# EAGLE board Board (EAGLE 5.10)
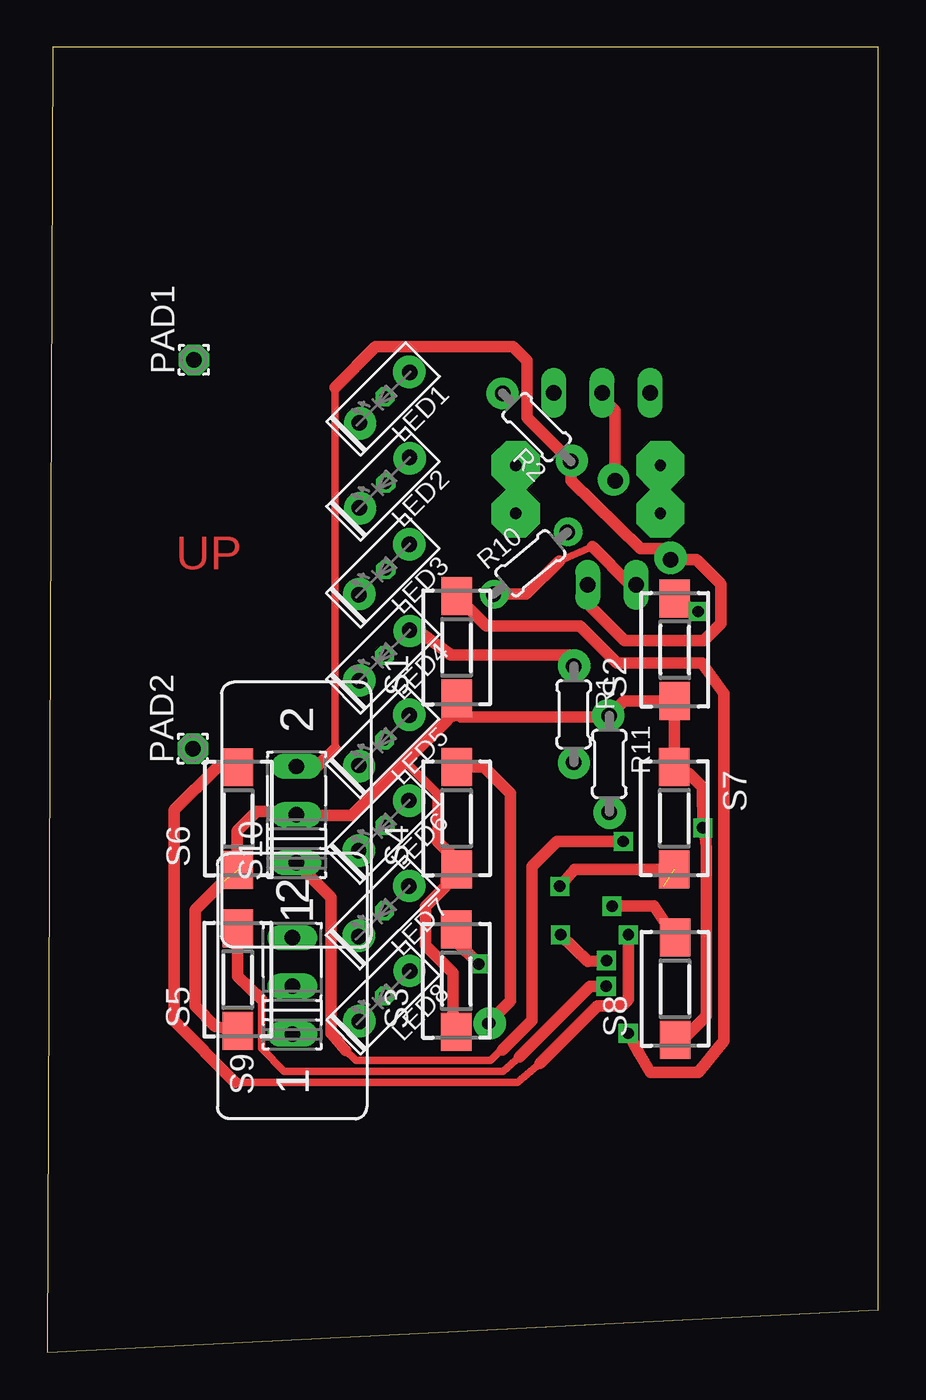
[diagram p0: board, top side]
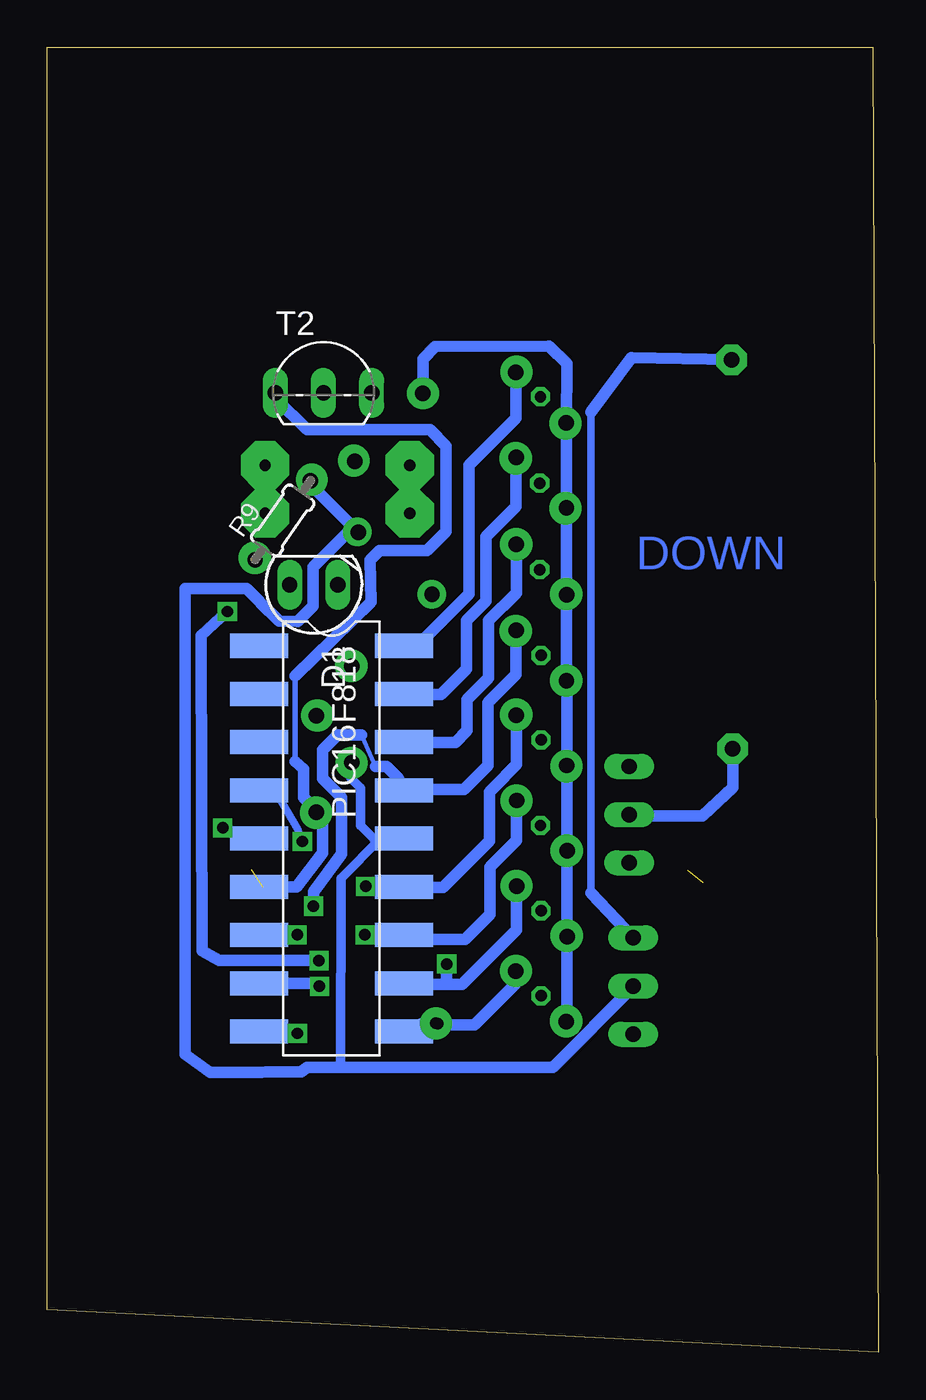
[diagram p1: board, bottom side, seen from below]

Size 43.77 x 68.73 mm. Coordinates in mm from the lower left corner, seen from the top.
Outline: 0,0 43.77,2.23 43.77,68.73 0.27,68.73 0,0
Copper layers (1*16): Top 0.035mm / dielectric 1.5mm / Bottom 0.035mm
Design rules "default *": minimum track width 10mil, minimum drill 24mil, track to track 5mil, track to pad 5mil, pad to pad 5mil, via to via 5mil, smd to smd 8mil, copper to edge 20mil, drill to drill 8mil, minimum pad ring 10mil, minimum via ring 8mil, stop-mask expansion 4mil, vias tented up to drill 0mil, thermal gap 10mil

## Footprints (pad centres in the part's own frame; a part is rotated, then mirrored left to right if it is on the bottom)
SFH205 = drill 0.813 long: A 0,-1.27; K 0,1.27
LED2X5 = drill 0.813 octagon: A -1.878,0; K 1.878,0
1,6/0,8 = drill 0.813 pad 1.6 octagon: 1 0,0
PIC16F818 = smd 1.27 x 3.048: P$1 -8.89,-3.81; P$2 -6.35,-3.81; P$3 -3.81,-3.81; P$4 -1.27,-3.81; P$5 1.27,-3.81; P$6 3.81,-3.81; P$7 6.35,-3.81; P$8 8.89,-3.81; P$9 11.43,-3.81; P$10 11.43,3.81; P$11 8.89,3.81; P$12 6.35,3.81; P$13 3.81,3.81; P$14 1.27,3.81; P$15 -1.27,3.81; P$16 -3.81,3.81; P$17 -6.35,3.81; P$18 -8.89,3.81
0204/5 = drill 0.813 octagon: 1 -2.54,0; 2 2.54,0
DTSM-3 = smd 2 x 1.6: 1 -2.7,0; 2 2.7,0
M251 = drill 0.813 long: 1 -2.54,0; 2 0,0; 3 2.54,0
TO92-ECB = drill 0.813 long: B 2.54,0; C 0,0; E -2.54,0

## Placement (x,y rotation side)
D1  SFH205  [SFH205]  29.74,40.42 270 bottom
LED1  [LED2X5]  17.76,50.28 225 top
LED2  [LED2X5]  17.75,45.8 225 top
LED3  [LED2X5]  17.74,41.23 225 top
LED4  [LED2X5]  17.75,36.7 225 top
LED5  [LED2X5]  17.73,32.23 225 top
LED6  [LED2X5]  17.72,27.73 225 top
LED7  [LED2X5]  17.72,23.22 225 top
LED8  [LED2X5]  17.76,18.74 225 top
PAD1  WIREPAD4,16O1,6  [1,6/0,8]  7.71,52.28 90 top
PAD2  WIREPAD4,16O1,6  [1,6/0,8]  7.66,31.79 90 top
PIC1  PIC16F818  [PIC16F818]  28.8,28.32 270 bottom
R1  47k  [0204/5]  27.73,33.6 270 top
R2  560  [0204/5]  25.78,48.72 135 top
R9  47k  [0204/5]  31.37,43.82 55 bottom
R10  470  [0204/5]  25.45,41.56 40 top
R11  47k  [0204/5]  29.6,30.99 270 top
S1  DTSM-3  [DTSM-3]  21.56,37.12 90 top
S2  DTSM-3  [DTSM-3]  33.05,37 90 top
S3  DTSM-3  [DTSM-3]  21.55,19.56 90 top
S4  DTSM-3  [DTSM-3]  21.56,28.12 90 top
S5  DTSM-3  [DTSM-3]  10.03,19.62 90 top
S6  DTSM-3  [DTSM-3]  10.05,28.11 90 top
S7  DTSM-3  [DTSM-3]  33.03,28.12 270 top
S8  DTSM-3  [DTSM-3]  33.07,19.14 90 top
S9  [M251]  12.9,19.28 90 top
S10  [M251]  13.12,28.31 90 top
T2  [TO92-ECB]  29.22,50.53 0 bottom

## Library data of the parts
D1 = opto-trans-siemens
LED1-LED8 = led grande cuadrado
PAD1 PAD2 = wirepad
PIC1 = pic16f818
R1 R2 R9-R11 = resistor
S1-S8 = switch-tact
S9 S10 = switch
T2 = transistor

## Nets
N$1: PIC1.P$14 R1.2 R9.2 R10.2 S9.2 T2.C
N$3: PAD1.1 S9.3
N$4: LED1.K LED2.K LED3.K LED4.K LED5.K LED6.K LED7.K LED8.K R2.2
N$6: PAD2.1 PIC1.P$5 R11.1 S1.1 S2.1 S3.1 S4.1 S5.1 S6.1 S7.1 S8.1 S10.2
N$7: LED8.A PIC1.P$10 S4.2
N$8: PIC1.P$7 S6.2
N$9: PIC1.P$9 S1.2
N$10: PIC1.P$8 S5.2
N$11: LED5.A PIC1.P$13 S7.2
N$12: LED4.A PIC1.P$15 R1.1 S8.2
N$13: LED7.A PIC1.P$11 S3.2
N$14: PIC1.P$4 S10.1
N$15: D1.K R2.1 R9.1 S10.3
N$19: LED6.A PIC1.P$12 S2.2
N$20: LED1.A PIC1.P$18
N$22: LED2.A PIC1.P$17
N$23: PIC1.P$6 R11.2 T2.E
N$24: D1.A R10.1
N$72: LED3.A PIC1.P$16

## Tracks (layer width: path | path; a pad name or v marks a point on that pad's centre or on a via)
N$1
  Top 0.6: T2.C 29.22,50.28 29.91,49.59 R9.2
  Bottom 0.406: 28.34,15.01 27.23,15.01 | 25.09,27.15 PIC1.P$14 26.22,27.05 | R10.2 27.4,43.62
  Bottom 0.5: R1.2 27.73,30.27 27.77,30.23 27.27,29.73 27.27,27.73 26.59,27.05 26.22,27.05 28.29,24.94 28.34,15.01
  Bottom 0.6: S9.2 12.9,19.26 17.13,14.99 26.87,14.99 28.34,15.01 | 29.77,46.04 R9.2 29.91,45.71 27.66,43.46 | 27.66,43.46 R10.2 | 27.66,43.46 29.77,41.35 29.77,39.31 30.59,38.48 31.57,38.5 32.56,39.49 32.56,39.52 33.27,40.23 36.51,40.23 36.51,15.69 35.2,14.74 32.49,14.74 32.26,14.75 30.41,14.75 30.08,15.01 27.23,15.01
N$2  (via drill 0.6 pad 1.7)
  other vias: 19.06,51.64
N$3
  Bottom 0.4: 15.14,49.52 15.14,24.19
  Bottom 0.6: PAD1.1 12.99,52.39 15.14,49.52 | S9.3 15.14,24.19
N$4
  Bottom 0.406: LED1.K | LED2.K | LED3.K 16.42,39.89 | LED4.K 16.4,35.35 | LED5.K | LED8.K 16.39,17.45
  Bottom 0.6: R2.2 23.98,52.32 23.34,52.98 17.35,53 16.4,52.08 16.42,48.96 LED1.K | LED2.K LED1.K | LED2.K | LED2.K 16.42,39.91 LED3.K 16.41,35.38 LED4.K | 16.4,35.35 LED5.K | LED5.K | LED5.K 16.4,26.41 LED6.K LED7.K | 16.39,17.45 LED7.K | LED7.K
N$5  (via drill 0.6 pad 1.7)
  other vias: 16.47,48.93
N$6  (via drill 0.6)  (1 unrouted)
  Top 0.4: 21.79,33.46 21.07,33.36
  Top 0.406: 12.95,28.48 S10.2 13.17,28.26 | 9.98,25.49 S6.1 | 33.7,16.69 S8.1 | 34.62,27.38 v34.53,27.62 34.57,27.28 | S7.1 33.8,30.49 | S2.1 32.9,34.27 | 21.59,33.53 S1.1 21.79,33.46 | 21.62,25.68 20.99,25.68 S4.1 | 21.37,16.67 S3.1
  Top 0.5: 21.56,25.92 21.19,26.29 | 20.52,26.92 20.52,29.43 18.87,31.08
  Top 0.6: 21.79,33.46 29.53,33.46 R11.1 30.37,34.3 S2.1 33.03,34.28 S7.1 | 13.17,28.26 16.02,28.26 18.87,31.11 | 18.87,31.11 21.07,33.31 21.07,33.36 | 21.19,26.29 21.19,25.79 S4.1 21.01,24.87 21.01,24.56 19.92,23.47 19.92,21.42 21.37,19.97 21.37,16.67 | 20.52,26.92 21.56,25.92 | 18.87,31.11 18.87,31.08 | 9.24,24.75 7.77,23.28 7.77,18.23 8.84,17.16 S5.1 | 9.98,25.49 9.99,25.5 9.99,27.45 11.02,28.48 12.95,28.48 | 33.8,30.49 34.52,29.77 v34.53,27.62 34.7,27 34.71,26.43 34.71,17.7 33.7,16.69
  Bottom 0.406: v34.53,27.62 32.63,27.03 PIC1.P$5
  Bottom 0.6: PAD2.1 7.66,29.74 9.27,28.23 13.04,28.23 S10.2
N$7  (via drill 0.6)
  Top 0.6: S4.2 23.01,30.82 24.4,29.43 24.4,18.49 v23.21,17.3
  Bottom 0.4: 24.49,16.89 PIC1.P$10
  Bottom 0.406: PIC1.P$10 24.88,17.28
  Bottom 0.6: LED8.A 19.09,19.41 21.27,17.23 23.14,17.23 v23.21,17.3 24.08,17.3 24.49,16.89
N$8  (via drill 0.6)
  Top 0.406: 25.96,15.21 24.76,14.2 9.9,14.21 | v30.61,21.98 30.55,21.92
  Top 0.6: 25.96,15.21 28.98,18.23 30.27,18.23 30.61,18.57 v30.61,21.98 | S6.2 8.93,30.81 6.67,28.55 6.67,17.44 9.9,14.21
  Bottom 0.406: PIC1.P$7
  Bottom 0.6: v30.61,21.98 v30.62,21.97 PIC1.P$7
N$9  (via drill 0.6)
  Top 0.6: v30.6,16.79 31.19,15.72 31.76,14.74 34.3,14.74 35.63,16.4 35.63,34.69 34.48,36.3 30,36.3 28.05,38.25 23.13,38.25 S1.2
  Bottom 0.406: 31.72,16.86 32.58,16.86 PIC1.P$9
  Bottom 0.6: 31.72,16.86 31.49,16.63 v30.6,16.79
N$10  (via drill 0.6)
  Top 0.406: 11.29,18.57 11.29,15.99 12.48,14.79 24.01,14.78 24.86,15.55
  Top 0.6: S5.2 10.03,19.79 11.29,18.57 | 24.86,15.55 28.58,19.27 v29.44,19.27
  Bottom 0.406: PIC1.P$8 32.45,19.27
  Bottom 0.6: v29.44,19.27 29.6,19.43 PIC1.P$8
N$11  (via drill 0.6)  (1 unrouted)
  Top 0.6: v27,24.54 27.76,25.43 S7.2
  Bottom 0.406: 19.06,33.53 LED5.A | 24.88,24.4 PIC1.P$13 v27,24.54 26.01,24.49
  Bottom 0.6: 19.06,33.53 19.06,30.94 20.27,29.73 20.27,29.71 20.48,29.5 20.48,26.93 22.92,24.49 24.97,24.49 PIC1.P$13
N$12  (via drill 0.6)
  Top 0.4: R1.1 27.73,36.26
  Top 0.6: LED4.A 19.47,38.03 21.27,36.73 27.64,36.73 R1.1 | v29.75,23.49 31.96,23.49 S8.2
  Bottom 0.2: 27.23,32.52 27.05,32.16 26.47,30.85
  Bottom 0.406: PIC1.P$15 24.76,29.36
  Bottom 0.6: 27.23,32.52 28.48,32.52 29.27,31.73 29.27,30.23 28.27,29.23 28.27,26.23 29.75,24.24 29.76,23.7 v29.75,23.49 | 26.47,30.85 25.89,30.85 25.27,30.23 25.27,29.87 PIC1.P$15 24.94,29.64 21.82,29.64 20.55,30.91 20.55,34.23 19.08,35.7 LED4.A
N$13  (via drill 0.6)
  Top 0.4: S3.2 21.55,21.62
  Top 0.6: 21.55,21.62 v22.73,20.44
  Bottom 0.406: PIC1.P$11 24.86,19.3
  Bottom 0.6: LED7.A 19.05,22.25 21.93,19.37 22.77,19.37 | 22.77,19.37 24.93,19.37 PIC1.P$11 | v22.73,20.44 22.73,19.41 22.77,19.37
N$14  (via drill 0.6)
  Top 0.4: 15.71,15.9 16.25,15.36 23.34,15.36 23.9,15.92 23.99,15.92
  Top 0.6: S10.1 14.94,23.95 14.94,16.79 15.71,15.9 | v30.34,26.9 26.85,26.9 25.53,25.58 25.53,17.46 23.99,15.92
  Bottom 0.4: PIC1.P$4 32.58,29.56 31.63,29.36 30.58,27.56 30.4,26.84 v30.34,26.9
N$15
  Top 0.4: R9.1 32.87,41.82 | 17.77,52.97 17.6,52.97 | 15.15,50.81 15.15,31.77
  Top 0.6: S10.3 14.22,30.85 15.15,31.77 | 15.15,50.81 17.3,52.97 17.77,52.97 24.53,52.97 25.27,52.23 25.27,49.23 R2.1 27.58,45.92 31.25,42.33 32.32,42.33 R9.1 34.2,41.74 35.48,40.46 35.48,38.39 34.58,37.49 30.4,37.49 28.47,39.42 D1.K
N$16  (via drill 0.6 pad 1.7)
  other vias: 16.47,44.45
N$17  (via drill 0.6 pad 1.7)
  other vias: 19.09,47.09
N$18  (via drill 0.6 pad 1.68)
  other vias: 23.98,50.51
N$19  (via drill 0.6)
  Top 0.4: 33.17,39.59 S2.2
  Top 0.6: v27.04,21.98 28.47,20.58 v29.46,20.62 | 33.17,39.59 34.17,39.03 v34.29,39.01
  Bottom 0.4: v27.04,21.98 26.04,21.97 PIC1.P$12
  Bottom 0.406: PIC1.P$12 24.83,21.81
  Bottom 0.6: LED6.A 19.05,26.95 20.45,25.55 20.45,23.05 21.77,21.73 24.75,21.73 PIC1.P$12 | v34.29,39.01 35.66,37.74 35.63,21.13 34.73,20.62 v29.46,20.62
N$20
  Bottom 0.406: PIC1.P$18 24.91,37.13
  Bottom 0.6: LED1.A 19.09,49.21 21.57,46.73 21.57,39.93 24.27,37.23 24.97,37.23 PIC1.P$18
N$21  (via drill 0.6 pad 1.68)
  other vias: 27.63,46.96
N$22
  Bottom 0.406: PIC1.P$17 24.86,34.54
  Bottom 0.6: LED2.A 19.08,44.53 20.66,42.95 20.66,39.56 21.68,38.54 21.68,35.99 23.02,34.65 24.97,34.65 PIC1.P$17
N$23
  Bottom 0.3: 30.71,31.11 30.71,35.61
  Bottom 0.406: PIC1.P$6 32.55,24.57
  Bottom 0.6: 30.71,35.61 26.73,39.51 26.77,41.73 26.27,42.23 23.77,42.23 22.77,43.23 22.77,47.73 23.6,48.61 30.1,48.61 31.76,50.22 T2.E | 30.71,31.11 30.27,30.71 30.27,29.23 29.6,28.56 R11.2 29.27,28.12 29.27,26.3 30.63,24.51 PIC1.P$6
N$24
  Top 0.4: 26.97,41.68 28.71,42.44
  Top 0.6: D1.A 30.73,40.42 28.71,42.44 | 26.97,41.68 25.22,39.93 R10.1
N$25  (via drill 0.6 pad 2.54)
  other vias: 24.68,46.72
N$26  (via drill 0.6 pad 2.54)
  other vias: 24.68,44.18
N$27  (via drill 0.6 pad 2.54)
  other vias: 32.3,44.18
N$28  (via drill 0.6 pad 1.7)
  other vias: 19.07,42.55
N$29  (via drill 0.6 pad 2.54)
  other vias: 32.3,46.72
N$30  (via drill 0.6 pad 1.68)
  other vias: 29.84,45.96
N$31  (via drill 0.6 pad 1.7)
  other vias: 16.43,39.94
N$32  (via drill 0.6 pad 1.7)
  other vias: 16.44,35.38
N$33  (via drill 0.6 pad 1.7)
  other vias: 19.09,37.99
N$34  (via drill 0.6 pad 1.42)
  other vias: 32.82,41.81
N$35  (via drill 0.6 pad 1.5)
  other vias: 23.53,39.93
N$36  (via drill 0.6 pad 1.5)
  other vias: 27.43,43.22
N$37  (via drill 0.6 pad 1.7)
  other vias: 19.07,33.57
N$38  (via drill 0.6 pad 1.7)
  other vias: 16.42,30.87
N$39  (via drill 0.6 pad 1.7)
  other vias: 19.06,29.04
N$40  (via drill 0.6 pad 1.7)
  other vias: 16.41,26.41
N$41  (via drill 0.6 pad 1.7)
  other vias: 19.06,24.56
N$42  (via drill 0.6 pad 1.7)
  other vias: 16.41,21.93
N$43  (via drill 0.6 pad 1.7)
  other vias: 19.08,20.08
N$44  (via drill 0.6 pad 1.7)
  other vias: 16.43,17.43
N$45  (via drill 0.6 pad 1.7)
  other vias: 23.3,17.32
N$46  (via drill 0.6 pad 1.7)
  other vias: 27.76,36.16
N$47  (via drill 0.6 pad 1.7)
  other vias: 29.55,33.54
N$48  (via drill 0.6 pad 1.7)
  other vias: 27.74,31.03
N$49  (via drill 0.6 pad 1.7)
  other vias: 29.62,28.41
N$50  (via drill 0.6 pad 1.7)
  other vias: 32.84,41.85
N$51  (via drill 0.3 pad 1.1)
  other vias: 31.76,50.54
N$52  (via drill 0.3 pad 1.1)
  other vias: 29.22,50.52
N$53  (via drill 0.3 pad 1.1)
  other vias: 26.68,50.51
N$54  (via drill 0.3 pad 1.1)
  other vias: 28.47,40.4
N$55  (via drill 0.3 pad 1.1)
  other vias: 31.03,40.43
N$56  (via drill 0.3 pad 1.1)
  other vias: 13.11,30.85
N$57  (via drill 0.3 pad 1.1)
  other vias: 13.14,28.32
N$58  (via drill 0.3 pad 1.1)
  other vias: 13.14,25.78
N$59  (via drill 0.3 pad 1.1)
  other vias: 12.9,21.83
N$60  (via drill 0.3 pad 1.1)
  other vias: 12.91,19.25
N$61  (via drill 0.3 pad 1.1)
  other vias: 12.94,16.73
N$62  (via drill 0.6)
  other vias: 17.79,50.33
N$63  (via drill 0.6)
  other vias: 17.83,45.77
N$64  (via drill 0.6)
  other vias: 17.83,41.22
N$65  (via drill 0.6)
  other vias: 17.76,36.7
N$66  (via drill 0.6)
  other vias: 17.76,32.25
N$67  (via drill 0.6)
  other vias: 17.79,27.74
N$68  (via drill 0.6)
  other vias: 17.76,23.25
N$69  (via drill 0.6)
  other vias: 17.76,18.77
N$72
  Bottom 0.406: PIC1.P$16 24.95,32.09
  Bottom 0.6: LED3.A 19.07,39.99 20.52,38.54 20.52,35.5 21.65,34.37 21.65,32.74 22.28,32.11 24.97,32.11 PIC1.P$16

## Text on the board
Top: UP
Bottom: DOWN